# Altium PCB SiLPA_HE.PcbDoc (part 2 of 10)
Units mm, origin at the board's own origin, x right, y up, seen from the top; angles counter-clockwise.
Board outline 222.47 x 100.01 mm, 4 copper layers (Top Layer, Int1 (GND), Int2 (PWR), Bottom Layer), stack 1.508 mm thick; 661 components, 355 nets, 1925 pads, 1744 vias.
Unrouted connection lines stored in the file: 360.
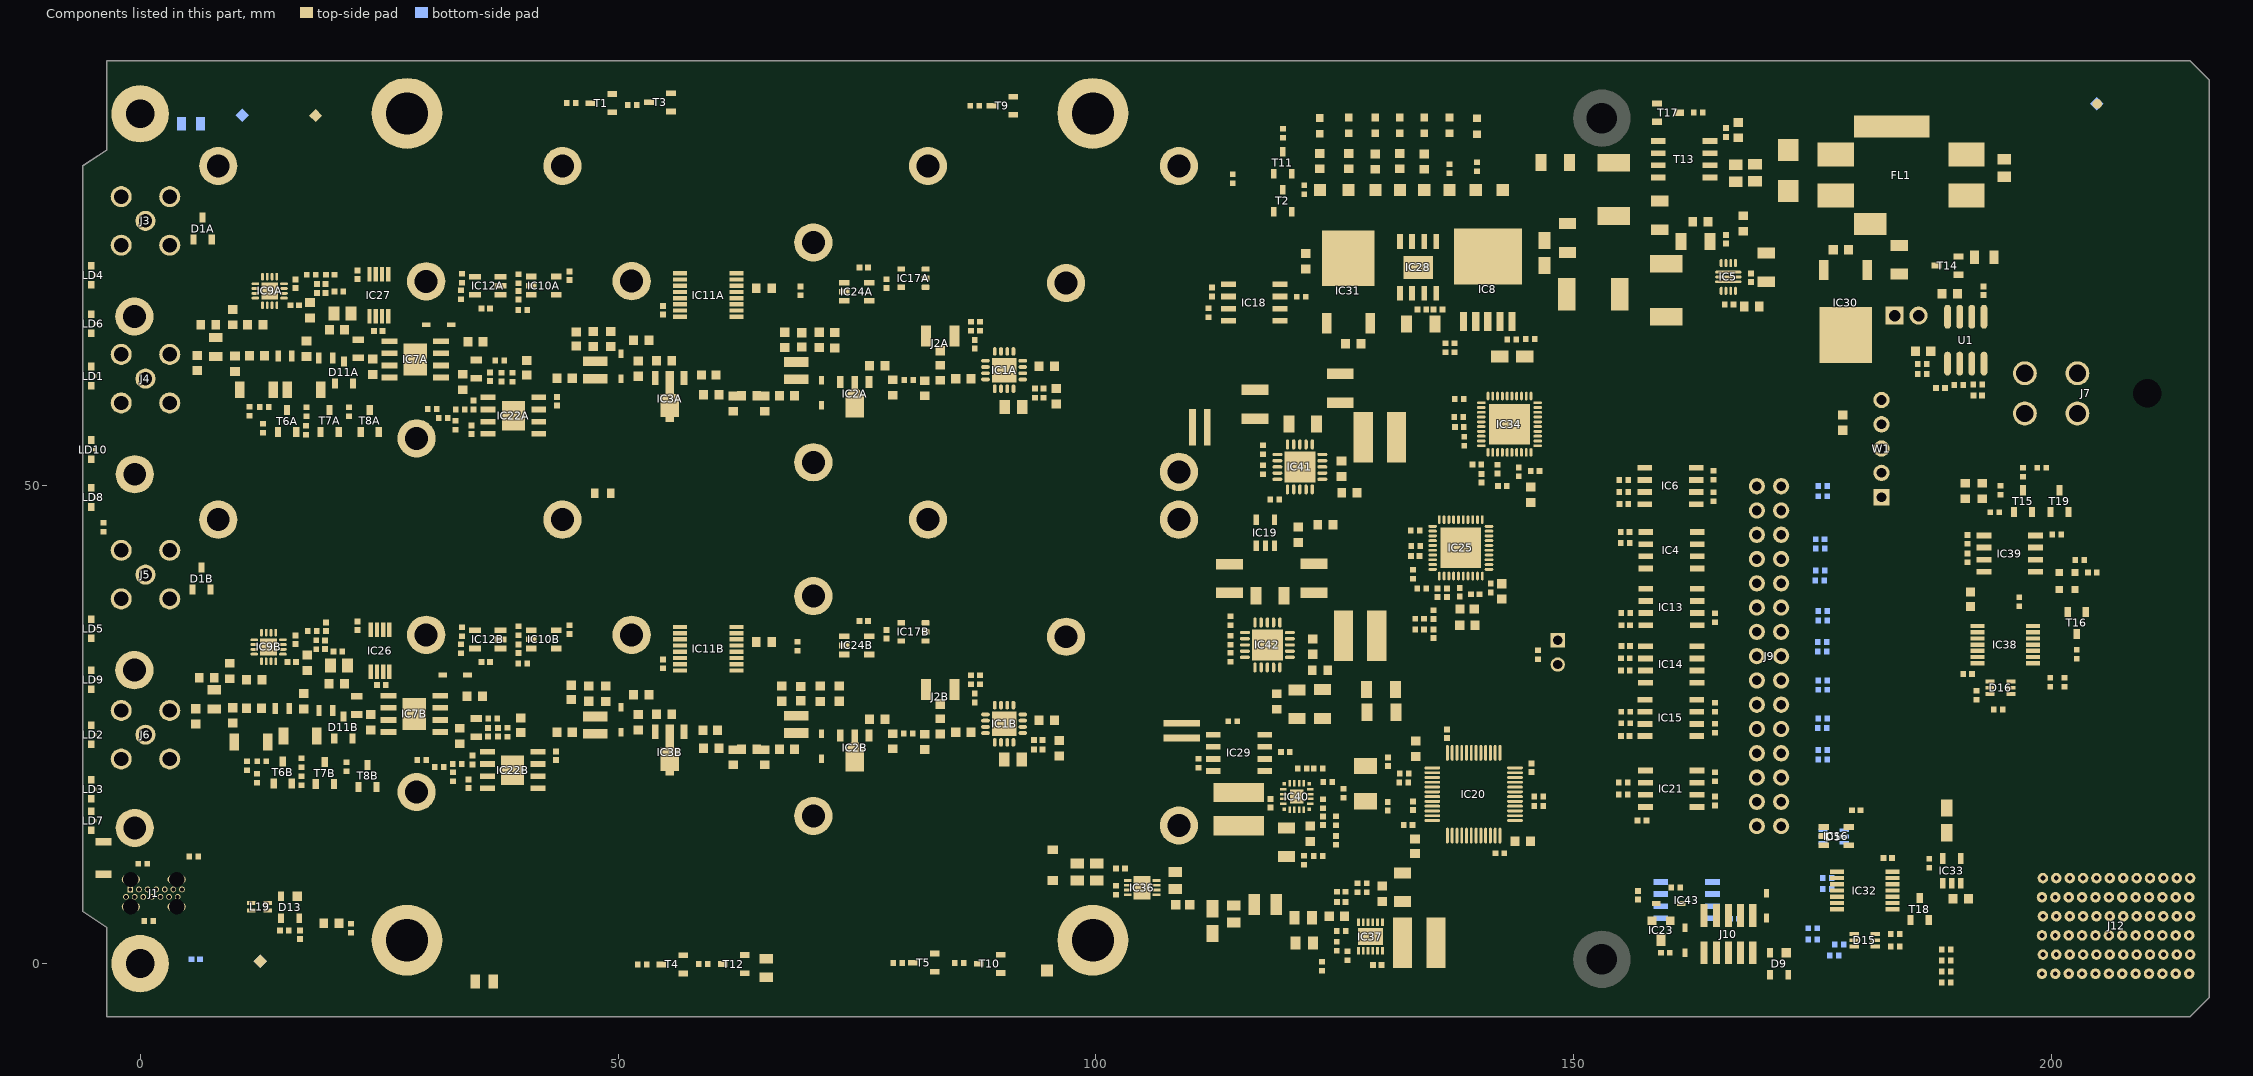
[diagram p4: the components of this part, seen from the top]

## Components (designator, comment, footprint, x,y, rotation, side; value= is the part's Value field where it differs from the comment) (continued)
J10 "Header 10" HARWIN_M50-3600542 166.167,3.082 r180 top
J11 "KK®" MOLEX_22-04-1021 184.802,67.793 r0 top
J12 "" AMPHENOL_10052825-101LF 206.716,3.943 r90 top locked
JP1 "1798942 (goldpin 2x 2.54)" jump 148.31,33.821 r0 top
L1A "1000R@100MHz" INDC1608X95N 72.677,65.213 r270 top (schematic designator L1)
L1B "1000R@100MHz" INDC1608X95N 73.127,28.243 r270 top (schematic designator L1)
L2A "1000R@100MHz" INDC1608X95N 52.417,65.213 r0 top (schematic designator L2)
L2B "1000R@100MHz" INDC1608X95N 52.427,28.143 r0 top (schematic designator L2)
L3A "1uH" IND_ABRACON_AISC-1008 68.647,62.023 r270 top (schematic designator L3)
L3B "1uH" IND_ABRACON_AISC-1008 68.647,25.023 r270 top (schematic designator L3)
L4A "1uH" IND_ABRACON_AISC-1008 47.627,62.098 r270 top (schematic designator L4)
L4B "1uH" IND_ABRACON_AISC-1008 47.627,24.943 r270 top (schematic designator L4)
L5A "390R@100MHz" INDC1608X95N 95.823,59.356 r90 top (schematic designator L5)
L5B "390R@100MHz" INDC1608X95N 96.176,22.52 r90 top (schematic designator L5)
L8 "1.5uH" IND_TDK_SPM6530 154.177,80.993 r270 top
L9 "1.5uH" IND_TDK_SPM6530 159.677,70.443 r90 top
L10 "1.5uH" IND_TDK_SPM6530 152.027,70.043 r180 top
L11 "4.7uH" IND_WURTH_WE-SPC-4838 129.707,55.06 r180 top
L12A "1.2uH" IND_TDK_ADL2012 22.815,64.323 r90 top (schematic designator L12)
L12B "1.2uH" IND_TDK_ADL2012 22.653,27.004 r90 top (schematic designator L12)
L13A "1.2uH" IND_TDK_ADL2012 35.177,62.193 r270 top (schematic designator L13)
L13B "1.2uH" IND_TDK_ADL2012 35.177,24.693 r270 top (schematic designator L13)
L15A "" IND_MURATA_LQW18AN_G8 19.427,63.343 r180 top value=4.7nH (schematic designator L15)
L15B "" IND_MURATA_LQW18AN_G8 19.429,26.483 r180 top value=4.7nH (schematic designator L15)
L16A "" IND_MURATA_LQW18AN_G8 15.161,63.57 r180 top value=6.8nH (schematic designator L16)
L16B "" IND_MURATA_LQW18AN_G8 14.874,26.71 r180 top value=6.8nH (schematic designator L16)
L17 "1uH" INDC2620X100N 117.689,6.161 r180 top
L18 "120R@100MHz" INDC1608X65N 109.076,6.147 r180 top
L19 "90R@100MHz" IND_MURATA_DLW21S 12.493,5.938 r0 top
L20 "10uH" IND_WURTH_WE-SPC-4838 133.803,2.178 r0 top
L21 "4.7uH" IND_WURTH_WE-SPC-4838 114.927,16.166 r90 top
L22 "4.7uH" IND_WURTH_WE-SPC-4838 127.627,34.279 r180 top
LD1 "" LED_AVAGO_HSMC-C120 -5.1,61.464 r90 top locked
LD2 "Green" LED_AVAGO_HSME-C120 -5.1,23.943 r90 top locked
LD3 "" LED_AVAGO_HSME-C120 -5.1,18.243 r90 top locked
LD4 "" LED_AVAGO_HSME-C120 -5.1,72.002 r90 top locked
LD5 "" LED_AVAGO_HSME-C120 -5.1,35.025 r90 top locked
LD6 "" LED_AVAGO_HSME-C120 -5.1,66.943 r90 top locked
LD7 "" LED_AVAGO_HSME-C120 -5.1,14.943 r90 top locked
LD8 "" LED_AVAGO_HSMC-C120 -5.1,48.768 r90 top locked
LD9 "" LED_AVAGO_HSME-C120 -5.1,29.693 r90 top locked
LD10 "" LED_AVAGO_HSMC-C120 -5.1,53.768 r90 top locked
LD11 "Green" LED_KINGBRIGHT_KPH-1608CGCKr 136.977,87.693 r270 top
LD12 "Green" LED_KINGBRIGHT_KPH-1608CGCKr 134.336,87.693 r270 top
LD13 "Green" LED_KINGBRIGHT_KPH-1608CGCKr 139.859,87.593 r270 top
LD14 "Green" LED_KINGBRIGHT_KPH-1608CGCKr 129.227,87.693 r270 top
LD15 "Green" LED_KINGBRIGHT_KPH-1608CGCKr 126.427,87.693 r270 top
LD16 "Green" LED_KINGBRIGHT_KPH-1608CGCKr 123.427,87.634 r270 top
LD18 "Green" LED_KINGBRIGHT_KPH-1608CGCKr 131.796,87.693 r270 top
M1 "Plated Hole" MTG300_600#1 -0.073,96.193 r0 top locked
M4 "Plated Hole" MTG300_600#2 0.163,0 r0 top locked
Q1 "8MHz" XTAL_TXC_7A 128.175,18.825 r270 top
R1A "100" RESC1005X40N 86.927,66.693 r270 top (schematic designator R1)
R1B "100" RESC1005X40N 86.927,29.693 r270 top (schematic designator R1)
R2A "100" RESC1005X40N 87.867,66.683 r270 top (schematic designator R2)
R2B "100" RESC1005X40N 87.867,29.683 r270 top (schematic designator R2)
R3A "1k" RESC1608X55N 54.827,63.083 r180 top (schematic designator R3)
R3B "1k" RESC1608X55N 54.827,26.083 r180 top (schematic designator R3)
R4A "Undefined" RESC1608X55N 83.687,61.813 r270 top (schematic designator R4)
R4B "Undefined" RESC1608X55N 83.687,24.813 r270 top (schematic designator R4)
R5A "37R4" RESC1608X55N 63.717,59.403 r180 top (schematic designator R5)
R5B "37R4" RESC1608X55N 63.717,22.403 r180 top (schematic designator R5)
R6 "0" RESC1005X40N 177.736,1.993 r180 bottom
R7A "0" RESC1608X55N 82.097,60.193 r90 top (schematic designator R7)
R7B "0" RESC1608X55N 82.097,23.193 r90 top (schematic designator R7)
R8A "0" RESC1608X55N 78.727,60.263 r90 top (schematic designator R8)
R8B "0" RESC1608X55N 78.727,23.263 r90 top (schematic designator R8)
R9A "150" RESC1608X55N 65.357,58.583 r90 top (schematic designator R9)
R9B "150" RESC1608X55N 65.357,21.583 r90 top (schematic designator R9)
R10A "150" RESC1608X55N 62.037,58.583 r90 top (schematic designator R10)
R10B "150" RESC1608X55N 62.037,21.583 r90 top (schematic designator R10)
R11 "330" RESC1005X40N 45.117,90.043 r0 top
R12 "330" RESC1005X40N 51.492,89.803 r0 top
R13 "330" RESC1005X40N 5.627,11.197 r0 top
R14 "330" RESC1005X40N 52.533,-0.089 r0 top
R15 "330" RESC1005X40N 58.906,-0.049 r0 top
R16 "100" RESC1005X40N 155.386,43.983 r0 top
R17 "49R9" RESC1608X55N 168.605,68.743 r0 top
R18A "0" RESC1005X40N 38.964,61.352 r270 top (schematic designator R18)
R18B "0" RESC1005X40N 38.427,24.193 r270 top (schematic designator R18)
R19A "39" RESC1005X40N 37.64,63.073 r180 top (schematic designator R19)
R19B "39" RESC1005X40N 36.913,25.622 r180 top (schematic designator R19)
R20 "10k" RESC1005X40N 121.788,80.943 r90 top
R21A "750" RESC1608X55N 33.768,60.833 r270 top (schematic designator R21)
R21B "750" RESC1608X55N 33.447,23.803 r270 top (schematic designator R21)
R22 "10k" RESC1005X40N 194.005,47.218 r180 top
R23A "1k" RESC1005X40N 39.587,71.665 r90 top (schematic designator R23)
R23B "1k" RESC1005X40N 39.587,34.818 r90 top (schematic designator R23)
R24A "0" RESC1005X40N 17.914,72.064 r0 top (schematic designator R24)
R24B "0" RESC1005X40N 18.004,34.793 r0 top (schematic designator R24)
R25A "0" RESC1608X55N 65.267,70.643 r0 top (schematic designator R25)
R25B "0" RESC1608X55N 65.267,33.643 r0 top (schematic designator R25)
R26 "100" RESC1005X40N 164.775,17.008 r90 top
R27A "82" RESC1608X55N 9.705,67.626 r270 top (schematic designator R27)
R27B "82" RESC1608X55N 9.375,30.6 r270 top (schematic designator R27)
R28 "56k" RESC1608X55N 163.227,77.599 r180 top
R29A "15k" RESC1005X40N 12.979,58.228 r180 top (schematic designator R29)
R29B "15k" RESC1005X40N 12.742,21.169 r180 top (schematic designator R29)
R30 "8k2" RESC1608X55N 167.727,77.422 r270 top
R31A "3R9" RESC1005X40N 18.5,70.625 r270 top (schematic designator R31)
R31B "3R9" RESC1005X40N 18.427,33.348 r270 top (schematic designator R31)
R32A "10k" RESC1005X40N 33.557,69.973 r90 top (schematic designator R32)
R32B "10k" RESC1005X40N 33.557,32.943 r90 top (schematic designator R32)
R33A "20k" RESC1005X40N 33.677,71.693 r270 top (schematic designator R33)
R33B "20k" RESC1005X40N 33.677,34.693 r270 top (schematic designator R33)
R34 "100" RESC1005X40N 164.62,48.858 r90 top
R35 "100" RESC1005X40N 155.211,49.328 r0 top
R36 "100" RESC1005X40N 164.62,51.068 r90 top
R37 "100" RESC1005X40N 155.211,50.598 r0 top
R38 "100" RESC1005X40N 164.777,36.2 r90 top
R39 "100" RESC1005X40N 155.405,36.67 r0 top
R40 "0" RESC1005X40N 177.254,0.857 r180 bottom
R41 "0" RESC1005X40N 188.957,0.306 r0 top
R42 "100" RESC1005X40N 155.394,31.944 r0 top
R43 "100" RESC1005X40N 155.394,30.674 r0 top
R44 "100" RESC1005X40N 164.74,24.602 r90 top
R45 "100" RESC1005X40N 155.427,25.139 r0 top
R46 "100" RESC1005X40N 164.74,26.812 r90 top
R47 "100" RESC1005X40N 155.427,26.342 r0 top
R48 "0" RESC1005X40N 188.957,1.451 r0 top
R49 "0" RESC1005X40N 188.957,-0.84 r0 top
R50 "0" RESC1005X40N 188.957,-1.985 r0 top
R51 "100k" RESC1608X55N 167.177,87.193 r270 top
R52A "82" RESC1005X40N 40.031,68.363 r180 top (schematic designator R52)
R52B "82" RESC1005X40N 40.039,31.395 r180 top (schematic designator R52)
R53 "22" RESC1005X40N 198.957,51.873 r0 top
R54 "200" RESC1005X40N 196.971,51.403 r90 top
R55 "330" RESC1005X40N -3.838,45.637 r90 top
R56 "100k" RESC1005X40N 186.452,62.718 r180 top
R57 "33k" RESC1005X40N 190.277,60.518 r180 top
R58 "22k" RESC1005X40N 186.457,61.693 r0 top
R59A "3k9" RESC1005X40N 17.406,57.725 r270 top (schematic designator R59)
R59B "3k9" RESC1005X40N 16.864,21.011 r270 top (schematic designator R59)
R60A "82" RESC1005X40N 21.837,57.725 r270 top (schematic designator R60)
R60B "82" RESC1005X40N 21.604,20.594 r270 top (schematic designator R60)
R61 "10k" RESC1005X40N 114.311,82.095 r270 top
R62A "10k" RESC1005X40N 12.855,56.021 r90 top (schematic designator R62)
R62B "10k" RESC1005X40N 12.25,19.4 r90 top (schematic designator R62)
R63 "10k" RESC1005X40N 146.227,32.31 r90 top
R64 "330" RESC1005X40N 119.567,86.887 r270 top
R65 "10k" RESC1005X40N 123.647,-0.281 r270 top
R66 "10k" RESC1005X40N 159.579,1.132 r0 top
R67 "10k" RESC1005X40N 192.116,28.062 r270 top
R68 "18k" RESC1005X40N 192.252,60.568 r180 top
R69 "24k" RESC1608X55N 20.011,4.222 r180 top
R70 "10k" RESC1005X40N 22.081,3.714 r270 top
R71A "10k" RESC1005X40N 17.35,55.8 r90 top (schematic designator R71)
R71B "10k" RESC1005X40N 16.864,19.111 r90 top (schematic designator R71)
R72 "10k" RESC1005X40N 163.03,89.018 r0 top
R73A "1k54" RESC2012X60N 7.925,64.5 r270 top (schematic designator R73)
R73B "1k54" RESC2012X60N 7.775,27.65 r270 top (schematic designator R73)
R74 "330" RESC1005X40N 87.306,89.743 r0 top
R75 "2k2" RESC1005X40N 146.302,16.468 r180 top
R76 "2k2" RESC1005X40N 146.302,17.493 r180 top
R77 "2k2" RESC1005X40N 132.262,19.886 r0 top
R78 "2k2" RESC1005X40N 132.215,18.948 r0 top
R79 "10k" RESC1005X40N 194.402,26.589 r0 top
R80 "24k" RESC1005X40N 143.497,65.308 r180 top
R81 "3k9" RESC1005X40N 145.421,65.324 r180 top
R82 "27k" RESC1005X40N 134.105,68.438 r180 top
R83 "3k" RESC1005X40N 135.781,68.438 r180 top
R84 "330" RESC1005X40N 85.699,0.069 r0 top
R85 "0" RESC1005X40N 134.072,39.243 r180 top
R86 "0" RESC1005X40N 133.177,40.743 r270 top
R87 "0" RESC1005X40N 133.453,43.676 r180 top
R88 "0" RESC1005X40N 133.397,45.303 r180 top
R89 "10K" RESC1005X40N 194.636,49.518 r270 top value=10k
R90 "10k" RESC1005X40N 196.591,37.868 r270 top
R91 "4R7" RESC2012X60N 192.927,73.893 r180 top
R92 "0" RESC1005X40N 176.027,22.337 r180 bottom
R93 "10k" RESC1005X40N 160.672,7.976 r0 top
R94 "5k1" RESC1005X40N 0.266,10.447 r180 top
R95 "5k1" RESC1005X40N 0.897,4.443 r180 top
R96 "0" RESC1005X40N 139.859,52.2 r180 top
R97 "0" RESC1005X40N 138.527,54.643 r270 top
R98 "0" RESC1005X40N 137.961,57.174 r180 top
R99 "0" RESC1005X40N 138.027,59.043 r180 top
R100 "330" RESC1005X40N 79.246,0.069 r0 top
R101A "0" RESC1005X40N 80.417,61.051 r180 top (schematic designator R101)
R101B "0" RESC1005X40N 80.379,24.051 r180 top (schematic designator R101)
R102 "0" RESC1005X40N 137.527,64.443 r270 top
R103 "0" RESC1005X40N 136.582,64.413 r90 top
R104 "0" RESC1005X40N 128.327,7.943 r270 top
R105 "0" RESC1005X40N 188.352,60.193 r0 top
R106 "3k3" RESC1608X55N 134.336,83.895 r90 top
R107 "10k" RESC1005X40N 139.859,83.381 r90 top
R108 "1k" RESC1608X55N 129.227,83.895 r90 top
R109 "1k" RESC1608X55N 126.427,83.943 r90 top
R110 "1k" RESC1608X55N 123.427,83.943 r90 top
R111 "10k" RESC1005X40N 201.332,29.45 r90 top
R112 "2k7" RESC1608X55N 192.711,49.449 r90 top
R113 "10k" RESC1005X40N 199.832,29.45 r90 top
R114 "0" RESC1005X40N 202.602,32.368 r90 top
R115 "2k7" RESC1608X55N 190.927,49.449 r270 top
R116 "10k" RESC1005X40N 187.177,10.493 r90 top
R117 "100" RESC1005X40N 155.177,17.693 r0 top
R118 "100" RESC1005X40N 164.775,19.533 r90 top
R119 "100" RESC1005X40N 155.177,18.943 r0 top
R120 "0" RESC1005X40N 174.968,3.694 r180 bottom
R121 "0" RESC1005X40N 176.497,7.813 r180 bottom
R122 "0" RESC1005X40N 174.968,2.503 r180 bottom
R123 "0" RESC1005X40N 176.497,8.943 r180 bottom
R124A "2k4" RESC1005X40N 31.723,57.092 r0 top (schematic designator R124)
R124B "2k4" RESC1005X40N 29.475,21.279 r0 top (schematic designator R124)
R125A "22k" RESC1005X40N 34.866,58.438 r270 top (schematic designator R125)
R125B "22k" RESC1005X40N 34.789,21.299 r270 top (schematic designator R125)
R126A "22k" RESC1005X40N 33.504,57.968 r180 top (schematic designator R126)
R126B "22k" RESC1005X40N 33.187,20.878 r180 top (schematic designator R126)
R127A "0" RESC1005X40N 32.99,56.3 r270 top (schematic designator R127)
R127B "0" RESC1005X40N 32.717,19.534 r270 top (schematic designator R127)
R128 "0" RESC1005X40N 127.361,7.943 r270 top
R129 "33k" RESC1005X40N 102.108,7.693 r270 top
R130 "Undefined" RESC1005X40N 125.661,3.39 r0 top
R131 "10k" RESC1005X40N 126.331,0.803 r270 top
R132 "10k" RESC1005X40N 102.564,9.945 r180 top
R133 "22" RESC1005X40N 183.639,1.793 r180 top
R134 "56k" RESC1005X40N 125.191,1.812 r270 top
R135 "240k" RESC1005X40N 121.564,20.415 r180 top
R136 "100k" RESC1005X40N 123.767,16.729 r270 top
R137 "0" RESC1608X55N 126.507,49.26 r0 top
R138 "22" RESC1005X40N 183.619,3.093 r180 top
R139 "100k" RESC1005X40N 125.116,14.932 r90 top
R140 "160k" RESC1005X40N 117.457,53.739 r90 top
R141A "2k" RESC1005X40N 11.427,57.778 r90 top (schematic designator R141)
R141B "2k" RESC1005X40N 11.163,20.712 r90 top (schematic designator R141)
R142 "10k" RESC1005X40N 117.457,51.682 r90 top
R143 "10k" RESC1005X40N 123.24,20.415 r180 top
R144 "10k" RESC1005X40N 118.707,48.56 r180 top
R145 "0" RESC1005X40N 176.027,49.941 r180 bottom
R146 "0" RESC1005X40N 175.777,43.443 r180 bottom
R147 "0" RESC1005X40N 175.777,41.143 r180 bottom
R148 "0" RESC1005X40N 176.027,35.893 r180 bottom
R149 "0" RESC1005X40N 175.997,33.643 r180 bottom
R150 "0" RESC1005X40N 176.027,28.643 r180 bottom
R151 "0" RESC1005X40N 176.027,25.643 r180 bottom
R152 "10k" RESC1005X40N 124.227,18.995 r180 top
R153 "0" RESC1608X55N 123.427,30.693 r0 top
R154 "160k" RESC1005X40N 114.087,35.848 r90 top
R155 "0" RESC3216X65N 121.624,56.446 r180 top
R156 "10k" RESC1005X40N 114.087,33.809 r90 top
R157 "10k" RESC1005X40N 114.087,32.035 r90 top
R158 "0" RESC3216X65N 118.202,38.47 r180 top
R159 "0" RESC1005X40N 123.261,11.244 r180 top
R160 "0" RESC1005X40N 121.75,10.788 r90 top
R161 "0" RESC1005X40N 125.917,17.839 r270 top
R164A "49R9" RESC1608X55N 7.125,66.825 r0 top (schematic designator R164)
R164B "49R9" RESC1608X55N 6.975,29.9 r0 top (schematic designator R164)
R165A "0" RESC1005X40N 30.553,58.011 r0 top (schematic designator R165)
R165B "0" RESC1005X40N 31.3,20.55 r0 top (schematic designator R165)
R166A "10k" RESC1005X40N 69.1,70.365 r90 top (schematic designator R166)
R166B "10k" RESC1005X40N 68.774,33.193 r90 top (schematic designator R166)
R168 "0" RESC1005X40N 176.027,29.621 r180 bottom
R171 "0" RESC1608X55N 123.995,45.893 r180 top
R172 "0" RESC1608X55N 118.927,27.413 r90 top
R173 "0R01" RES_BOURNS_CFG0612 110.881,56.118 r180 top
R174 "0" RESC1005X40N 111.783,68.085 r270 top
R175 "1M1" RESC2012X60N 5.327,87.843 r0 bottom
R176 "0" RESC1005X40N 121.488,69.763 r0 top
R177 "10M" RESC2113X55N 65.507,-0.458 r90 top
R178 "10M" RESC2113X55N 36.002,-1.857 r180 top
R179 "0R01" RES_BOURNS_CFG0612 108.96,24.371 r270 top
R180 "0" RESC1005X40N 114.293,25.35 r180 top
R181 "0" RESC1005X40N 110.705,20.939 r270 top
R182 "10k" RESC1005X40N 133.848,34.972 r180 top
R183 "10k" RESC1005X40N 133.848,36.072 r180 top
R197 "0" RESC1005X40N 200.491,44.868 r0 top
R216 "3k3" RESC1608X55N 131.796,83.943 r90 top
R218 "10k" RESC1005X40N 136.977,83.143 r90 top
R235 "0" RESC1005X40N 176.027,48.893 r180 bottom
R236 "0" RESC1005X40N 175.747,44.393 r180 bottom
R241 "0" RESC1005X40N 175.727,40.093 r180 bottom
R242 "0" RESC1005X40N 176.027,36.893 r180 bottom
R243 "0" RESC1005X40N 175.997,32.643 r180 bottom
R247 "0" RESC1005X40N 175.997,24.643 r180 bottom
R248 "0" RESC1005X40N 176.027,21.365 r180 bottom
R274 "10K" RESC1005X40N 202.924,42.199 r180 top value=10k
RT1 "100k" THERMC1608X95N 48.402,49.193 r180 top
S1 "9774140360" 9774140360 27.927,88.943 r0 top
S2 "9774140360" 9774140360 99.677,88.943 r0 top
S3 "9774140360" 9774140360 27.927,2.443 r0 top
S4 "9774140360" 9774140360 99.677,2.443 r0 top
SCREW1A "" BOSSARD_BN5687-3061579_v 70.427,75.443 r90 top value=M2x4 (schematic designator SCREW1)
SCREW1B "" BOSSARD_BN5687-3061579_v 70.427,38.443 r90 top value=M2x4 (schematic designator SCREW1)
SCREW2A "" BOSSARD_BN5687-3061579_v 82.427,83.443 r90 top value=M2x4 (schematic designator SCREW2)
SCREW2B "" BOSSARD_BN5687-3061579_v 82.427,46.443 r90 top value=M2x4 (schematic designator SCREW2)
SCREW3A "" BOSSARD_BN5687-3061579_v 44.177,83.443 r90 top value=M2x4 (schematic designator SCREW3)
SCREW3B "" BOSSARD_BN5687-3061579_v 44.177,46.443 r90 top value=M2x4 (schematic designator SCREW3)
SCREW4A "" BOSSARD_BN5687-3061579_v 8.177,83.443 r90 top value=M2x4 (schematic designator SCREW4)
SCREW4B "" BOSSARD_BN5687-3061579_v 8.177,46.443 r90 top value=M2x4 (schematic designator SCREW4)
SCREW5A "" BOSSARD_BN5687-3061579_v -0.603,67.693 r90 top locked value=M2x4 (schematic designator SCREW5)
SCREW5B "" BOSSARD_BN5687-3061579_v -0.603,30.693 r90 top locked value=M2x4 (schematic designator SCREW5)
SCREW6A "" BOSSARD_BN5687-3061579_v 51.427,71.393 r90 top value=M2x4 (schematic designator SCREW6)
SCREW6B "" BOSSARD_BN5687-3061579_v 51.427,34.393 r90 top value=M2x4 (schematic designator SCREW6)
SCREW7A "" BOSSARD_BN5687-3061579_v 28.927,54.943 r90 top value=M2x4 (schematic designator SCREW7)
SCREW7B "" BOSSARD_BN5687-3061579_v 28.927,17.943 r90 top value=M2x4 (schematic designator SCREW7)
SCREW8A "" BOSSARD_BN5687-3061579_v -0.563,51.193 r90 top locked value=M2x4 (schematic designator SCREW8)
SCREW8B "" BOSSARD_BN5687-3061579_v -0.563,14.193 r90 top locked value=M2x4 (schematic designator SCREW8)
SCREW9A "" BOSSARD_BN5687-3061579_v 29.927,71.376 r90 top locked value=M2x4 (schematic designator SCREW9)
SCREW9B "" BOSSARD_BN5687-3061579_v 29.927,34.443 r90 top value=M2x4 (schematic designator SCREW9)
SCREW10A "" BOSSARD_BN5687-3061579_v 108.677,51.443 r90 top value=M2x4 (schematic designator SCREW10)
SCREW10B "" BOSSARD_BN5687-3061579_v 108.677,14.443 r90 top value=M2x4 (schematic designator SCREW10)
SCREW11A "" BOSSARD_BN5687-3061579_v 108.677,83.443 r90 top value=M2x4 (schematic designator SCREW11)
SCREW11B "" BOSSARD_BN5687-3061579_v 108.677,46.443 r90 top value=M2x4 (schematic designator SCREW11)
SCREW12A "" BOSSARD_BN5687-3061579_v 70.427,52.443 r90 top value=M2x4 (schematic designator SCREW12)
SCREW12B "" BOSSARD_BN5687-3061579_v 70.427,15.443 r90 top value=M2x4 (schematic designator SCREW12)
SCREW13A "" BOSSARD_BN5687-3061579_v 96.877,71.193 r90 top value=M2x4 (schematic designator SCREW13)
SCREW13B "" BOSSARD_BN5687-3061579_v 96.877,34.193 r90 top value=M2x4 (schematic designator SCREW13)
SW1 "" FP-B3U-3000PM-MFG -4.173,11.063 r90 top locked
T1 "BSH103" SOT95P230X110-3N 48.262,90.013 r180 top
T2 "BSH103" SOT95P230X110-3N 119.543,79.793 r90 top
T3 "BSH103" SOT95P230X110-3N 54.391,90.102 r180 top
T4 "BSH103" SOT95P230X110-3N 55.663,-0.089 r180 top
T5 "BSH103" SOT95P230X110-3N 81.977,0.093 r180 top
T6A "BSS138LT1G" SOT95P240X110-3N 15.377,56.753 r90 top (schematic designator T6)
T6B "BSS138LT1G" SOT95P240X110-3N 14.925,20 r90 top (schematic designator T6)
T7A "BSS138LT1G" SOT95P240X110-3N 19.825,56.775 r90 top (schematic designator T7)
T7B "BSS138LT1G" SOT95P240X110-3N 19.325,19.925 r90 top (schematic designator T7)
T8A "BSS138LT1G" SOT95P240X110-3N 24.022,56.775 r90 top (schematic designator T8)
T8B "BSS138LT1G" SOT95P240X110-3N 23.789,19.644 r90 top (schematic designator T8)
T9 "BSH103" SOT95P230X110-3N 90.218,89.743 r180 top
T10 "BSH103" SOT95P230X110-3N 88.869,-0.031 r180 top
T11 "BSH103" SOT95P230X110-3N 119.543,83.779 r90 top
T12 "BSH103" SOT95P230X110-3N 62.115,-0.049 r180 top
T13 "SI4425DDY-T1-GE3" SOIC127P600X175-8N 161.527,84.143 r180 top
T14 "BSS138LT1G" SOT95P240X110-3N 189.102,73.018 r180 top
T15 "BSS138LT1G" SOT95P240X110-3N 196.986,48.368 r90 top
T16 "BSS138LT1G" SOT95P240X110-3N 202.602,35.641 r270 top
T17 "BSS138LT1G" SOT95P240X110-3N 159.852,89.018 r0 top
T18 "BSS138LT1G" SOT95P240X110-3N 186.177,5.693 r90 top
T19 "BSS138LT1G" SOT95P240X110-3N 200.802,48.368 r90 top
TP1 "Test Point" TPS127 134.336,80.943 r0 top
TP2 "Test Point" TPS127 139.731,80.943 r0 top
TP3 "Test Point" TPS127 129.227,80.943 r0 top
TP4 "Test Point" TPS127 126.414,80.943 r0 top
TP5 "Test Point" TPS127 123.427,80.943 r0 top
TP16 "Test Point" TPS127 131.796,80.943 r270 top
TP18 "Test Point" TPS127 136.977,80.943 r270 top
TP22 "Test Point" TPS127 142.557,80.943 r90 top
TP23 "Test Point" TPS127 94.877,-0.717 r90 top
U1 "TC649EOA" SOIC-OA8_M 190.992,65.218 r90 top
W1 "Header 5" SAMTEC_HTSW-105-23-L-S 182.177,48.798 r90 top
WASHER2 "D11.1xd6.6" Keystone_7687 -15.5,77.85 r0 top
WASHER4 "D11.1xd6.6" Keystone_7687 -15.5,61.546 r0 top
WASHER6 "D11.1xd6.6" Keystone_7687 -14.825,40.725 r0 top
WASHER8 "D11.1xd6.6" Keystone_7687 -14.825,23.975 r0 top

## Footprints (in the part's own frame and the unit in brackets; to place one, negate y for a bottom-side part, rotate by r counter-clockwise, add the part's x,y. Pads: shape width x height; smd on the part's side, far side on the other; paste and mask are expansions set on the pad)
3M_N2530-6002RB [mm] "30 Contacts - Straight .100\" x .100\" Low Profile Four-Wall Header"
  round 1.7 hole 1: 1(-17.78,-1.27) 2(-17.78,1.27) 3(-15.24,-1.27) 4(-15.24,1.27) 5(-12.7,-1.27) 6(-12.7,1.27) 7(-10.16,-1.27) 8(-10.16,1.27) 9(-7.62,-1.27) 10(-7.62,1.27) 11(-5.08,-1.27) 12(-5.08,1.27) 13(-2.54,-1.27) 14(-2.54,1.27) 15(0,-1.27) 16(0,1.27) 17(2.54,-1.27) 18(2.54,1.27) 19(5.08,-1.27) 20(5.08,1.27) 21(7.62,-1.27) 22(7.62,1.27) 23(10.16,-1.27) 24(10.16,1.27) 25(12.7,-1.27) 26(12.7,1.27) 27(15.24,-1.27) 28(15.24,1.27) 29(17.78,-1.27) 30(17.78,1.27)
  silkscreen extent -22.71,-4.85 22.71,4.52, body extent -22.71,-4.11 22.71,4.52, height 9.91
9774140360 [mm] "SMD Steel Spacer with internal Thread"
  round 7.4 smd paste-576.133: 1(0,0)
  round 0 hole 4.4 unplated: ""(0,0)
  body extent -3.03,-2.94 2.95,3.04, height 14
AMPHENOL_10052825-101LF [mm]
  round 1.1 hole 0.5: A1(-5,-7.65) A2(-3,-7.75) A3(-1,-7.65) A4(1,-7.75) A5(3,-7.65) A6(5,-7.75) B1(-5,-6.25) B2(-3,-6.35) B3(-1,-6.25) B4(1,-6.35) B5(3,-6.25) B6(5,-6.35) C1(-5,-4.85) C2(-3,-4.95) C3(-1,-4.85) C4(1,-4.95) C5(3,-4.85) C6(5,-4.95) D1(-5,-3.45) D2(-3,-3.55) D3(-1,-3.45) D4(1,-3.55) D5(3,-3.45) D6(5,-3.55) E1(-5,-2.05) E2(-3,-2.15) E3(-1,-2.05) E4(1,-2.15) E5(3,-2.05) E6(5,-2.15) F1(-5,-0.65) F2(-3,-0.75) F3(-1,-0.65) F4(1,-0.75) F5(3,-0.65) F6(5,-0.75) G1(-5,0.75) G2(-3,0.65) G3(-1,0.75) G4(1,0.65) G5(3,0.75) G6(5,0.65) H1(-5,2.15) H2(-3,2.05) H3(-1,2.15) H4(1,2.05) H5(3,2.15) H6(5,2.05) I1(-5,3.55) I2(-3,3.45) I3(-1,3.55) I4(1,3.45) I5(3,3.55) I6(5,3.45) J1(-5,4.95) J2(-3,4.85) J3(-1,4.95) J4(1,4.85) J5(3,4.95) J6(5,4.85) K1(-5,6.35) K2(-3,6.25) K3(-1,6.35) K4(1,6.25) K5(3,6.35) K6(5,6.25) L1(-5,7.75) L2(-3,7.65) L3(-1,7.75) L4(1,7.65) L5(3,7.75) L6(5,7.65)
  silkscreen extent -6.95,-4.65 6.95,11.85, body extent -6.95,-21.95 6.95,11.85, height 15.25
"ANALOG-DEVICES_LQFN(16) # 05-08-1798" [mm] "LQFN, 16-Lead, 0.50mm Pitch; 3.50mm W X 3.50mm L X 0.83mm H body (with 4 Tab 0.375 X0.375mm and with a Thermal Tab 1.43 X1.43mm)# 05-08-1798"
  rect 0.7x0.25 smd: 1(-1.4,0.75) 2(-1.4,0.25) 3(-1.4,-0.25) 4(-1.4,-0.75) 9(1.4,-0.75) 10(1.4,-0.25) 11(1.4,0.25) 12(1.4,0.75)
  rect 0.25x0.7 smd: 5(-0.75,-1.4) 6(-0.25,-1.4) 7(0.25,-1.4) 8(0.75,-1.4) 13(0.75,1.4) 14(0.25,1.4) 15(-0.25,1.4) 16(-0.75,1.4)
  rect 1.43x1.43 smd: 17(0,0)
  rect 0.375x0.375 smd: 18(-1.312,-1.312) 19(1.312,-1.312) 20(1.312,1.312) 21(-1.312,1.312)
  silkscreen extent -2.4,0.78 -2.2,0.97, body extent -1.5,-1.5 1.5,1.5, height 1.05
ANALOG-DEVICES_SOT-89(RK-3) [mm] "SOT89, 1.50mm Pitch; 3-Leads, 2.5mm W X 4.5mm L X 1.6mm H body"
  rect 1.25x0.7 smd: 1(-1.89,1.5) 3(-1.89,-1.5)
  rect 1.35x0.7 smd: 2(-1.84,0)
  rect 0.131x0.131 smd: 2(-0.968,-0.491) 2(-0.968,0.49) 2(-0.706,0.753) 2(-0.706,-0.753)
  rect 0.262x0.262 smd: 2(-0.771,0.556) 2(-0.771,-0.556)
  rect 3x0.85 smd: 2(0.335,0)
  rect 2.475x0.525 smd: 2(0.597,0.687) 2(0.597,-0.688)
  Top Layer region: -1.165,0.425 -0.64,0.95 -0.64,-0.95 -1.165,-0.425
  silkscreen extent -2.22,-2.25 1.24,2.58, body extent -2.44,-2.25 1.81,2.25, height 1.6
BOSSARD_BN5687-3061579_v [mm] "M2 L=4mm Hexalobular Socket Pan Head Screw, Fully Threaded - Stainless Steel A2"
  body extent -2,-2 2,2, height 1.6
CAPC1005X55N [mm] "Capacitor, Non-Polarized, Chip; 1.00mm L X 0.50mm W X 0.70mm H, IPC Medium Density"
  rect 0.62x0.62 smd: 1(-0.45,0) 2(0.45,0)
  body extent -0.52,-0.27 0.53,0.28, height 0.55
CAPC1608X87N [mm] "Chip Capacitor, Body 1.6x0.8mm IPC Medium Density"
  rect 0.95x1 smd: 1(-0.8,0) 2(0.8,0)
  body extent -0.87,-0.47 0.88,0.48, height 0.87
CAPC1608X90N [mm] "Chip Capacitor, Body 1.6x0.8mm IPC Medium Density"
  rect 0.95x0.95 smd: 1(-0.75,0) 2(0.75,0)
  body extent -0.85,-0.45 0.85,0.45, height 0.9
CAPC1709X95N [mm] "Capacitor, non-Polarized, Chip; 1.65mm L X 0.85mm W X 0.95mm H,IPC Medium Density"
  rect 0.95x1 smd: 1(-0.75,0) 2(0.75,0)
  body extent -0.87,-0.47 0.88,0.48, height 0.95
CAPC2012X95N [mm] "Chip Capacitor, Body 2.0x1.25mm, IPC Medium Density"
  rect 1.1x1.45 smd: 1(-0.9,0) 2(0.9,0)
  silkscreen extent 0,-0.58 0,0.58, body extent -1.05,-0.67 1.05,0.68, height 0.95
CAPC2012X110N [mm] "Chip Capacitor, Body 2.0x1.25mm, IPC Medium Density"
  rect 1.15x1.45 smd: 1(-0.9,0) 2(0.9,0)
  silkscreen extent 0,-0.58 0,0.58, body extent -1.05,-0.67 1.05,0.68, height 1.1
CAPC2012X135N [mm] "Chip Capacitor, Body 2.0x1.25mm, IPC Medium Density"
  rect 1.05x1.4 smd: 1(-0.9,0) 2(0.9,0)
  silkscreen extent 0,-0.58 0,0.58, body extent -1.05,-0.67 1.05,0.68, height 1.25
CAPC3216X180N [mm] "Chip Capacitor, Body 3.2x1.6mm, IPC Medium Density"
  rect 1.15x1.8 smd: 1(-1.5,0) 2(1.5,0)
  silkscreen extent -0.55,-0.8 0.55,0.8, body extent -1.7,-0.9 1.7,0.9, height 1.8
CAPC3225X280N [mm] "Chip Capacitor, Body 3.2x2.5mm, IPC Medium Density"
  rect 1.1x2.8 smd: 1(-1.5,0) 2(1.5,0)
  silkscreen extent -0.6,-1.25 0.6,1.25, body extent -1.7,-1.35 1.7,1.35, height 2.8
CAPMP3216X180N [mm] "Capacitor, Polarized, Molded  Body 3.2x1.6mm, IPC Medium Density"
  rect 1.8x1.25 smd: 1(-1.3,0) 2(1.3,0)
  silkscreen extent -2.4,-0.7 0,1.25, body extent -1.7,-0.9 1.7,0.9, height 1.6
CDBU [mil]
  rect 30x28 smd paste+0 mask+0: 1(-32.5,0) 2(32.5,0)
  silkscreen extent -10,-24 10,24, body extent -36,-19 36,19, height 33
DBV0005A_L [mm] "SOT23, 5-Leads, Body 3.05x1.75mm, Pitch 0.95mm, IPC High Density"
  rrect18% 0.8x0.55 smd: 1(-1.275,0.95) 2(-1.275,0) 3(-1.275,-0.95) 4(1.275,-0.95) 5(1.275,0.95)
  silkscreen extent -1.4,-1.55 0.5,1.9, body extent -1.42,-1.46 1.42,1.46, height 1.08
DELOCK_65848 [mm]
  round 2.1 hole 1.4: 1(0,0)
  round 2.2 hole 1.5: 2(-2.54,2.54) 2(-2.54,-2.54) 2(2.54,2.54) 2(2.54,-2.54)
  body extent -3.04,-3.17 18.96,3.09, height 9.15
DIOM5336X265N [mm] "DO-214-AA/SMB Diode, Molded Body; 5.34mm L X 3.625mm W X 2.65mm H, IPC Medium Density"
  rect 2.3x2.15 smd: 1(-2.15,0) 2(2.15,0)
  silkscreen extent -3.92,-1.8 2.65,1.8, body extent -2.7,-1.95 2.7,1.95, height 2.4
DIOMELF3515N [mm] "SOD80C, MELF Diode, 2-Leads, Body 3.5x1.5mm, IPC Medium Density"
  rect 1x1.75 smd: 1(-1.75,0) 2(1.75,0)
  silkscreen extent -0.85,-0.8 0.85,0.8, body extent -1.85,-0.8 1.85,0.8, height 1.6
FIDUCIAL_TOP_C100-200 [mm] "Round Fiducial Target, Top Layer, 1.0mm, Top Solder 2.0mm, Keepout =2.0mm"
  round 1 smd paste-0.51 mask+0.5: FTG2(0,0)
  Top Layer keep-out circle w0.1: c0,0 r1
FIDUCIAL_TOP_S100-200 [mm] "Square Fiducial Target, Top Layer, 1.0mm, Top Solder 2.0mm, Keepout =2.0mm"
  rect 1x1 smd rot 45 paste-0.51 mask+0.5: 1(0,0)
  Top Layer keep-out region: 1.414,0 0,-1.414 -1.414,0 0,1.414
FIL_MURATA_BNX02 [mm] "Block Type EMIFIL LC Combined Type, BNX02* Series"
  rect 3.8x2.5 smd: 1(-6.85,2.1) 2(6.85,2.1) 3(-6.85,-2.2) 4(6.85,-2.2)
  rect 7.9x2.3 smd: 4(1,-5.1)
  rect 3.4x2.3 smd: 4(3.25,5.1)
  silkscreen extent -5.95,-4.45 7.77,5.05, body extent -6.05,-4.55 6.05,4.55, height 3.1
FP-2169890001-MFG [mm]
  rrect100% 0.9x1.9 hole 1.6 slot 0.6 at 0 deg paste-2539.97 mask+0: 1(-1.43,5.575) 2(1.43,5.575) 3(-1.43,0.775) 4(1.43,0.775)
  rect 0.6x0.6 hole 0.4 paste-2539.97 mask+0: A1(-0.39,0.725)
  round 0.6 hole 0.4 paste-2539.97 mask+0: A4(-0.39,1.625) A5(-0.39,2.525) A6(-0.39,3.425) A7(-0.39,4.325) A9(-0.39,5.225) A12(-0.39,6.125) B1(0.39,5.675) B4(0.39,4.775) B5(0.39,3.875) B6(0.39,2.975) B7(0.39,2.075) B9(0.39,1.175) B12(0.39,0.275)
  silkscreen extent -2.65,0.5 1.98,7.42, body extent -2.08,-7.52 2.08,7.52, height 0.25
FP-B3U-3000PM-MFG [mm]
  rect 0.8x1.7 smd paste+0 mask+0: 1(-1.7,-0.35) 2(1.7,-0.35)
  silkscreen extent -1.6,-1.7 1.6,-1.58, body extent -2.2,-1.8 2.2,1.8, height 0.25
HARWIN_M50-3600542 [mm] "10 Contacts - Pitch 1.27mm - Dual Row SMT Vertical Pin Header"
  rect 0.74x2.4 smd: 1(-2.54,-1.95) 2(-2.54,1.95) 3(-1.27,-1.95) 4(-1.27,1.95) 5(0,-1.95) 6(0,1.95) 7(1.27,-1.95) 8(1.27,1.95) 9(2.54,-1.95) 10(2.54,1.95)
  silkscreen extent -3.17,-3.9 3.18,0.4, body extent -3.17,-2.81 3.17,2.69, height 4.69
HIROSE_U.FL-R-SMT-1(10) [mm] "Up to 6GHz Ultra Small Surface Mount Male Coaxial Connectors U.FL Series"
  rect 1x1.05 smd: 1(0,-1.525)
  rect 1.05x2.2 smd: 2(-1.475,0) 2(1.475,0)
  Top Layer keep-out lines w0.1: -0.6,-0.65 0.6,-0.65 0.6,0 ccw(c0,0) -0.6,0 -0.6,-0.65
  silkscreen extent -0.7,-0.69 0.7,1.55, body extent -1.5,-1.55 1.5,1.55, height 1.25
IND_ABRACON_AISC-1008 [mm] "Inductor, Molded Body; 2.92mm L X 2.79mm W, AISC-1008 Series"
  rect 1.02x2.54 smd: 1(-0.905,0) 2(0.905,0)
  silkscreen extent 0,-1.4 0,1.4, body extent -1.46,-1.39 1.46,1.4, height 2.29
IND_MURATA_DLW21S [mm] "Common Mode Choke Coil, DLW21S Series - Body 2 x 1.2mm"
  rect 0.9x0.4 smd: 1(-0.85,-0.4) 2(0.85,-0.4) 3(0.85,0.4) 4(-0.85,0.4)
  silkscreen extent -1.92,-0.6 0,0.6, body extent -1,-0.6 1,0.6, height 1.4
IND_MURATA_LQW18AN_G8 [mm] "SMT inductor 0603, Body Width 0.99mm Body Lenght 1.65mm Height 1mm"
  rect 0.57x1.15 smd: 1(-0.715,0) 2(0.715,0)
  silkscreen extent 0,-0.5 0,0.5, body extent -0.82,-0.49 0.83,0.5, height 1
IND_TDK_ADL2012 [mm] "Chip Inductor, EIA 0805, Metric 2012, Body 2.0x1.25mm"
  rect 0.7x1.2 smd: 1(-0.95,0) 2(0.95,0)
  silkscreen extent -0.3,-0.72 0.3,0.72, body extent -1.1,-0.72 1.1,0.73, height 1.4
IND_TDK_SPM6530 [mm] "SMD Inductor, 7.1mm L X 6.5mm W X 3mm H, TDK SPM6530 Series"
  rect 1.85x3.4 smd: 1(-2.775,0) 2(2.775,0)
  silkscreen extent -3.5,-3.2 3.5,3.2, body extent -3.6,-3.2 3.6,3.2, height 3.1
IND_WURTH_WE-SPC-4838 [mm] "SMD Inductor, Body 4.8x4.8mm"
  rect 2x5.3 smd: 1(-1.75,0) 2(1.75,0)
  silkscreen extent -0.4,-2.41 0.4,2.41, body extent -2.41,-2.41 2.41,2.41, height 3.81
INDC1005X55N [mm] "Chip Inductor, 2-Leads, EIA 0402, Metric 1005, Body 1x0.5mm, 0402IPC Medium Density"
  rect 0.6x0.62 smd: 1(-0.46,0) 2(0.46,0)
  body extent -0.52,-0.27 0.53,0.28, height 0.55
INDC1608X65N [mm] "Chip Inductor, 2-Leads, EIA 0603, Metric 1608, Body 1.6x0.8mm, IPC Medium Density"
  rect 1x1 smd: 1(-0.75,0) 2(0.75,0)
  body extent -0.87,-0.47 0.88,0.48, height 0.65
INDC1608X95N [mm] "Chip Inductor, 2-Leads, EIA 0603, Metric 1608, Body 1.6x0.8mm, IPC Medium Density"
  rect 0.95x1 smd: 1(-0.8,0) 2(0.8,0)
  body extent -0.87,-0.47 0.88,0.48, height 0.95
INDC2620X100N [mm] "Chip Inductor, EIA 1008, Metric 2520, Body 2.60mm L X 2.00mm W X 1.00mm H, IPC Medium Density"
  rect 1.2x2.2 smd: 1(-1.15,0) 2(1.15,0)
  silkscreen extent 0,-0.9 0,0.9, body extent -1.3,-1 1.3,1, height 1
jump [mm]
  rect 1.5x1.5 hole 0.965: 1(0,0)
  round 1.5 hole 0.965: 2(0,-2.54)
  silkscreen extent -1.2,-3.81 1.2,1.27, body extent -1.26,-3.84 1.19,1.24, height 8
Keystone_7687 [mm] "Polyphenylene Sulfide PPS Shoulder Washer"
LED_AVAGO_HSMC-C120 [mm] "Red Chip LED, 2-Leads, Body 1.7x1.1mm, Side Emitting Package"
  rect 0.8x0.7 smd: 1(-1,0) 2(1,0)
  rect 0.4x0.4 smd: 3(0,-0.35)
  silkscreen extent -1.12,-0.92 -0.88,-0.68, body extent -0.85,-0.3 0.85,0.8, height 0.7
LED_AVAGO_HSME-C120 [mm] "Green Chip LED, 2-Leads, Body 1.7x1.1mm, Side Emitting Package"
  rect 0.8x0.7 smd: 1(-1,0) 2(1,0)
  rect 0.4x0.4 smd: 3(0,-0.35)
  silkscreen extent -1.12,-0.92 -0.88,-0.68, body extent -0.85,-0.3 0.85,0.8, height 0.7
LED_KINGBRIGHT_KPH-1608CGCKr [mm] "SMT Green LED, Case 0603, Body L 1.6 x W 0.8mm H 0.65mm"
  rect 0.8x0.8 smd: 1(-0.825,0) 2(0.825,0)
  silkscreen extent -1.82,-0.4 0.08,0.4, body extent -0.8,-0.4 0.8,0.4, height 0.65
MINI-CIRCUITS_DF782 [mm] "MINI-CIRCUITS DF782 Case, 1.50mm pitch; 4 pin, 2.44mm W X 4.49mm L"
  rect 0.71x1.5 smd: 1(-1.5,-1.915) 3(1.5,-1.915)
  rect 0.917x2.41 smd: 2(0,-1.46)
  rect 0.92x0.493 smd: 4(0,2.418)
  rect 1.905x2.427 smd: 4(0,0.958)
  Top Layer region: -0.457,-0.751 -0.953,-0.255 -0.953,2.172 -0.46,2.665 0.46,2.665 0.953,2.172 0.953,-0.255 0.457,-0.751 0.457,-2.665 -0.457,-2.665
  silkscreen extent -2.3,-1.3 2.3,1.3, body extent -2.3,-2.12 2.3,2.12, height 1.6
MOLEX_22-04-1021 [mm] "2.5mm (.100\") Pitch KK® Header, Single Row, Vertical, 2 Circuits"
  rect 1.9x1.9 hole 1.2: 1(-1.25,0)
  round 1.9 hole 1.2: 2(1.25,0)
  silkscreen extent -2.25,-2.6 2.25,3.2, body extent -2.25,-2.6 2.25,3.2, height 11.7
MOLEX_39-30-0040 [mm] "4.20mm (.165\") Pitch Mini-Fit Jr. Header, Dual Row, Right Angle with Snap-in Plastic Peg PCB Lock, 4 Circuits"
  round 2.5 hole 1.8: 1(-2.1,2.75) 2(2.1,2.75) 3(-2.1,-2.75) 4(2.1,-2.75)
  round 1 hole 3 unplated mask+1: 5(0,10.05)
  silkscreen extent -2.64,-1.24 2.64,1.24, body extent -5.2,-3.28 4.8,16.65, height 11.4
MTG240_400#1 [mm] "Plated Through Hole: Hole Dia.=2.4mm Pad Dia.=4.0mm"
  round 4 hole 2.4: 1(0,0)
MTG240_400#2 [mm] "Plated Through Hole: Hole Dia.=2.4mm Pad Dia.=4.0mm"
  round 4 / inner round 3.5 / far side round 4 hole 2.4: 1(0,0)
MTG240_400#3 [mm] "Plated Through Hole: Hole Dia.=2.4mm Pad Dia.=4.0mm"
  round 4 hole 2.4: 1(0,-0.003)
MTG300_600#1 [mm] "Plated Through Hole: Hole Dia.=3.0mm Pad Dia.=6.0mm"
  round 6 hole 3: 1(0.073,-7.293)
MTG300_600#2 [mm] "Plated Through Hole: Hole Dia.=3.0mm Pad Dia.=6.0mm"
  round 6 hole 3: 1(-0.163,0)
QFN50P300X300X80-17N-S175 [mm] "QFN, 0.50mm Pitch, Square; 16 Pin, 3.00mm L X 3.00mm W X 0.80mm H Body (w/Thermal Tab 1.75 X 1.75mm),  IPC Medium Density"
  oval 0.8x0.3 smd: 1(-1.5,0.75) 2(-1.5,0.25) 3(-1.5,-0.25) 4(-1.5,-0.75) 9(1.5,-0.75) 10(1.5,-0.25) 11(1.5,0.25) 12(1.5,0.75)
  oval 0.3x0.8 smd: 5(-0.75,-1.5) 6(-0.25,-1.5) 7(0.25,-1.5) 8(0.75,-1.5) 13(0.75,1.5) 14(0.25,1.5) 15(-0.25,1.5) 16(-0.75,1.5)
  rect 1.75x1.75 smd: 17(0,0)
  silkscreen extent -2.62,-1.5 1.5,1.5, body extent -1.57,-1.57 1.58,1.58, height 0.8
QFN50P600X600X80-41N-S425 [mm] "QFN, 0.50mm Pitch, Square; 40 Pin, 6.00mm L X 6.00mm W X 0.80mm H body (w/Thermal Tab 4.25 x 4.25mm), IPC Medium Density"
  oval 0.9x0.3 smd: 1(-2.95,2.25) 2(-2.95,1.75) 3(-2.95,1.25) 4(-2.95,0.75) 5(-2.95,0.25) 6(-2.95,-0.25) 7(-2.95,-0.75) 8(-2.95,-1.25) 9(-2.95,-1.75) 10(-2.95,-2.25) 21(2.95,-2.25) 22(2.95,-1.75) 23(2.95,-1.25) 24(2.95,-0.75) 25(2.95,-0.25) 26(2.95,0.25) 27(2.95,0.75) 28(2.95,1.25) 29(2.95,1.75) 30(2.95,2.25)
  oval 0.3x0.9 smd: 11(-2.25,-2.95) 12(-1.75,-2.95) 13(-1.25,-2.95) 14(-0.75,-2.95) 15(-0.25,-2.95) 16(0.25,-2.95) 17(0.75,-2.95) 18(1.25,-2.95) 19(1.75,-2.95) 20(2.25,-2.95) 31(2.25,2.95) 32(1.75,2.95) 33(1.25,2.95) 34(0.75,2.95) 35(0.25,2.95) 36(-0.25,2.95) 37(-0.75,2.95) 38(-1.25,2.95) 39(-1.75,2.95) 40(-2.25,2.95)
  rect 4.25x4.25 smd: 41(0,0)
  silkscreen extent -4.13,-3 3,3, body extent -3,-3 3,3, height 0.8
QFN65P400X400X100-17N-S255 [mm] "QFN, 0.65mm pitch,square; 4 pin X 4 pin, 4mm X 4mm X 1mm H body (w/thermal tab 2.55 X 2.55mm),  IPC Medium Density"
  oval 0.9x0.4 smd: 1(-1.95,0.975) 2(-1.95,0.325) 3(-1.95,-0.325) 4(-1.95,-0.975) 9(1.95,-0.975) 10(1.95,-0.325) 11(1.95,0.325) 12(1.95,0.975)
  oval 0.4x0.9 smd: 5(-0.975,-1.95) 6(-0.325,-1.95) 7(0.325,-1.95) 8(0.975,-1.95) 13(0.975,1.95) 14(0.325,1.95) 15(-0.325,1.95) 16(-0.975,1.95)
  rect 2.55x2.55 smd: 17(0,0)
  silkscreen extent -3.13,-2 2,2, body extent -2,-2 2,2, height 1
QFN65P500X500X100-21N-S325 [mm] "QFN, 0.65mm pitch,square; 20 pin, 5mm X 5mm X 1mm H body (w/thermal tab 3.25 X 3.25mm),  IPC Medium Density"
  oval 1.05x0.35 smd: 1(-2.35,1.3) 2(-2.35,0.65) 3(-2.35,0) 4(-2.35,-0.65) 5(-2.35,-1.3) 11(2.35,-1.3) 12(2.35,-0.65) 13(2.35,0) 14(2.35,0.65) 15(2.35,1.3)
  oval 0.35x1.05 smd: 6(-1.3,-2.35) 7(-0.65,-2.35) 8(0,-2.35) 9(0.65,-2.35) 10(1.3,-2.35) 16(1.3,2.35) 17(0.65,2.35) 18(0,2.35) 19(-0.65,2.35) 20(-1.3,2.35)
  rect 3.25x3.25 smd: 21(0,0)
  silkscreen extent -3.57,-2.5 2.5,2.5, body extent -2.57,-2.57 2.58,2.58, height 1
RES_BOURNS_CFG0612 [mm] "EIA 0612, Metric 1632, Resistor, Chip; 1.60mm L X 3.20mm W X 0.90mm H, IPC Medium Density"
  rect 0.7x3.8 smd: 1(-0.775,0) 2(0.775,0)
  silkscreen extent 0,-1.6 0,1.6, body extent -0.8,-1.6 0.8,1.6, height 0.9
RESC1005X40N [mm] "Chip Resistor, EIA 0402, Metric 1005, Body 1.0x0.5mm, IPC Medium Density"
  rect 0.58x0.62 smd: 1(-0.47,0) 2(0.47,0)
  body extent -0.52,-0.27 0.53,0.28, height 0.4
RESC1608X55N [mm] "Chip Resistor, EIA 0603, Metric 1608, Body 1.6x0.8mm, IPC Medium Density"
  rect 0.9x1 smd: 1(-0.8,0) 2(0.8,0)
  body extent -0.87,-0.47 0.88,0.48, height 0.55
RESC2012X60N [mm] "Chip Resistor, EIA 0805, Metric 2012, Body 2.0x1.2mm, IPC Medium Density"
  rect 0.95x1.4 smd: 1(-1,0) 2(1,0)
  silkscreen extent 0,-0.55 0,0.55, body extent -1.1,-0.67 1.1,0.68, height 0.6
RESC2113X55N [mm] "Chip Resistor, EIA 0805, Metric 2113, Body 2.05x1.3mm, IPC Medium Density"
  rect 1x1.45 smd: 1(-0.95,0) 2(0.95,0)
  silkscreen extent 0,-0.55 0,0.55, body extent -1,-0.62 1,0.63, height 0.55
RESC3216X65N [mm] "Chip Resistor, EIA 1206, Metric 3216, Body 3.2x1.6mm, IPC Medium Density"
  rect 1.15x1.8 smd: 1(-1.45,0) 2(1.45,0)
  silkscreen extent -0.5,-0.9 0.5,0.9, body extent -1.67,-0.87 1.68,0.88, height 0.65
SAMTEC_HTSW-105-23-L-S [mm] "5 Contacts - Pitch 2.54mm - Single Row  Through Mount Straigh Header (Post Lead 5.84mm, Tail Lead 2.92mm, Insulator 2.54mm)"
  rect 1.7x1.7 hole 1: 1(0,0)
  round 1.7 hole 1: 2(2.54,0) 3(5.08,0) 4(7.62,0) 5(10.16,0)
  silkscreen extent -1.27,-1.27 11.43,1.93, body extent -1.27,-1.27 11.43,1.27, height 8.38
SOD2512X110N [mm]
  rect 0.9x0.5 smd: 1(-1.3,0) 2(1.3,0)
  silkscreen extent -1.62,-0.65 0.85,0.87, body extent -1.35,-0.67 1.35,0.68, height 1.1
SOD2513X114N [mm] "SOD-323 Diode; 1.75mm W X 1.30mm L X 1.14mm H Body, IPC Medium Density"
  rect 0.9x0.5 smd: 1(-1.3,0) 2(1.3,0)
  silkscreen extent -1.45,-0.72 0.95,0.82, body extent -1.4,-0.72 1.4,0.73, height 1.15
SODFL3517X110N [mm] "SODFL Diode (SOD123W); 2.60mm W X 1.70mm L X 1.10mm H body, IPC Medium Density"
  rect 0.92x1.08 smd: 1(-1.6,0) 2(1.6,0)
  silkscreen extent -1.93,-0.85 0.75,1.17, body extent -1.85,-0.95 1.85,0.95, height 1.1
SOIC127P600X170-9N-R240X310 [mm] "SOIC, 1.27mm Pitch, 8 Pin, 3.90mm W X 4.90mm L X 1.70mm H body (w/Thermal Tab 2.40 X 3.10mm), IPC Medium Density"
  rect 1.55x0.6 smd: 1(-2.7,1.905) 2(-2.7,0.635) 3(-2.7,-0.635) 4(-2.7,-1.905) 5(2.7,-1.905) 6(2.7,-0.635) 7(2.7,0.635) 8(2.7,1.905)
  rect 2.4x3.1 smd: 9(0,0)
  silkscreen extent -3.32,-2.45 1.55,2.88, body extent -3.1,-2.5 3.1,2.5, height 1.75
SOIC127P600X175-8N [mm]
  rect 1.55x0.6 smd: 1(-2.7,1.905) 2(-2.7,0.635) 3(-2.7,-0.635) 4(-2.7,-1.905) 5(2.7,-1.905) 6(2.7,-0.635) 7(2.7,0.635) 8(2.7,1.905)
  silkscreen extent -2.52,-2.5 1.55,2.88, body extent -3.1,-2.5 3.1,2.5, height 1.75
SOIC127P600X175-9N-R241X309 [mm] "SOIC 8, Pitch 1.27mm - Body 3.9x4.9mm, (w/thermal tab 2.41mm X 3.098mm), IPC Medium Density"
  rect 1.55x0.6 smd: 1(-2.65,1.905) 2(-2.65,0.635) 3(-2.65,-0.635) 4(-2.65,-1.905) 5(2.65,-1.905) 6(2.65,-0.635) 7(2.65,0.635) 8(2.65,1.905)
  rect 2.41x3.098 smd: 9(0,0)
  silkscreen extent -3.27,-2.45 1.5,2.87, body extent -3.1,-2.5 3.1,2.5, height 1.75
SOIC127P610X167-9N-R245X335 [mm] "SOIC, 1.27mm pitch; 8 pin, 3.89mm W X 4.90mm L X 1.67mm H body (w/thermal tab 2.45mm X 3.35mm), IPC Medium Density"
  rect 1.65x0.6 smd: 1(-2.7,1.905) 2(-2.7,0.635) 3(-2.7,-0.635) 4(-2.7,-1.905) 5(2.7,-1.905) 6(2.7,-0.635) 7(2.7,0.635) 8(2.7,1.905)
  rect 2.45x3.35 smd: 9(0,0)
  silkscreen extent -3.38,-2.45 1.5,2.87, body extent -3.05,-2.45 3.05,2.45, height 1.67
SOIC-OA8_M [mm] "SOIC, 8-Leads, Body 4.9x3.9mm, Pitch 1.27mm, IPC Low Density"
  oval 2.5x0.7 smd: 1(-2.45,1.905) 2(-2.45,0.635) 3(-2.45,-0.635) 4(-2.45,-1.905) 5(2.45,-1.905) 6(2.45,-0.635) 7(2.45,0.635) 8(2.45,1.905)
  silkscreen extent -2.57,-2.5 0.8,2.93, body extent -2,-2.5 2,2.5, height 1.75
SON50P300X300X80-9N-R175X248 [mm] "SON, (DFN) 0.50mm,pitch; 8 pin,3.00mm W X 3.00mm L X 0.80mm H body (w/thermal tab 1.75 X2.48mm), IPC Medium Density"
  rect 0.8x0.3 smd: 1(-1.5,0.75) 2(-1.5,0.25) 3(-1.5,-0.25) 4(-1.5,-0.75) 5(1.5,-0.75) 6(1.5,-0.25) 7(1.5,0.25) 8(1.5,0.75)
  rect 1.75x2.45 smd: 9(0,0)
  silkscreen extent -2.53,-1.5 1.5,1.5, body extent -1.55,-1.55 1.55,1.55, height 0.8
SON50P300X300X80-13N-R180X260 [mm] "SON, 0.50mm Pitch, 12-Pin, 3.00mm W  X 3.00mm L X 0.80mm Height, (w/Thermal Tab 1.8 X 2.6 mm), IPC Medium Density"
  rect 0.8x0.3 smd: 1(-1.5,1.25) 2(-1.5,0.75) 3(-1.5,0.25) 4(-1.5,-0.25) 5(-1.5,-0.75) 6(-1.5,-1.25) 7(1.5,-1.25) 8(1.5,-0.75) 9(1.5,-0.25) 10(1.5,0.25) 11(1.5,0.75) 12(1.5,1.25)
  rect 1.8x2.6 smd: 13(0,0)
  silkscreen extent -2.52,1.13 -2.28,1.38, body extent -1.55,-1.55 1.55,1.55, height 0.8
SOP65P490X109-8N [mm] "SOP, 0.65mm pitch; 8 pin,3.00mm W X 3.00mm L X 1.09mm H bodyI, PC Medium Density"
  rect 1.5x0.45 smd: 1(-2.2,0.975) 2(-2.2,0.325) 3(-2.2,-0.325) 4(-2.2,-0.975) 5(2.2,-0.975) 6(2.2,-0.325) 7(2.2,0.325) 8(2.2,0.975)
  silkscreen extent -2.82,-1.5 1.12,1.82, body extent -2.45,-1.55 2.45,1.55, height 1.09
SOP65P640X110-14N [mm]
  rect 1.45x0.45 smd: 1(-2.9,1.95) 2(-2.9,1.3) 3(-2.9,0.65) 4(-2.9,0) 5(-2.9,-0.65) 6(-2.9,-1.3) 7(-2.9,-1.95) 8(2.9,-1.95) 9(2.9,-1.3) 10(2.9,-0.65) 11(2.9,0) 12(2.9,0.65) 13(2.9,1.3) 14(2.9,1.95)
  silkscreen extent -3.47,-2.5 1.85,2.82, body extent -3.12,-2.55 3.12,2.55, height 1.1
SOP65P640X120-16N [mm]
  rect 1.45x0.45 smd: 1(-2.95,2.275) 2(-2.95,1.625) 3(-2.95,0.975) 4(-2.95,0.325) 5(-2.95,-0.325) 6(-2.95,-0.975) 7(-2.95,-1.625) 8(-2.95,-2.275) 9(2.95,-2.275) 10(2.95,-1.625) 11(2.95,-0.975) 12(2.95,-0.325) 13(2.95,0.325) 14(2.95,0.975) 15(2.95,1.625) 16(2.95,2.275)
  silkscreen extent -3.08,-2.55 1.85,3.17, body extent -3.12,-2.55 3.12,2.55, height 1.2
SOT65P210X110-6N [mm]
  rect 0.95x0.4 smd: 1(-1.1,0.65) 2(-1.1,0) 3(-1.1,-0.65) 4(1.1,-0.65) 5(1.1,0) 6(1.1,0.65)
  silkscreen extent -1.43,-1 0.3,1.47, body extent -1.2,-1.1 1.2,1.1, height 1.1
SOT95P230X110-3N [mm] "SOT23, 3 pin, Pitch 0.95mm - 1.3mm W X 2.9mm L X 1.1mm H, IPC Medium Density"
  rect 1x0.6 smd: 1(-1.15,0.95) 2(-1.15,-0.95) 3(1.15,0)
  silkscreen extent -1.53,-1.45 0.33,1.87, body extent -1.08,-1.5 1.25,1.5, height 1.1
SOT95P240X110-3N [mm]
  rect 1.05x0.65 smd: 1(-1.15,0.95) 2(-1.15,-0.95) 3(1.15,0)
  silkscreen extent -2.29,-1.45 0.3,1.45, body extent -1.25,-1.5 1.25,1.5, height 1.1
SOT95P270X145-5N [mm] "SOT, 0.95mm Pitch; 5 Pin,1.55mm W X 2.90mm L X 1.45mm H body, IPC Medium Density"
  rect 1.25x0.6 smd: 1(-1.35,0.95) 2(-1.35,0) 3(-1.35,-0.95) 4(1.35,-0.95) 5(1.35,0.95)
  silkscreen extent -1.83,-1.45 0.4,1.87, body extent -1.35,-1.45 1.35,1.45, height 1.45
SOT95P280X100-5N [mm] "SOT23, 0.95mm pitch; 5 pin, 1.625mm W X 2.9mm L, IPC Medium Density"
  rect 1.1x0.55 smd: 1(-1.35,0.95) 2(-1.35,0) 3(-1.35,-0.95) 4(1.35,-0.95) 5(1.35,0.95)
  silkscreen extent -1.77,-1.45 0.48,1.87, body extent -1.4,-1.5 1.4,1.5, height 1
SOT95P280X145-5N [mm] "SOT, 0.95mm pitch; 5 pin, 1.60mm W X 2.90mm L X 1.45mm H body, IPC Medium Density"
  rect 1.1x0.6 smd: 1(-1.3,0.95) 2(-1.3,0) 3(-1.3,-0.95) 4(1.3,-0.95) 5(1.3,0.95)
  silkscreen extent -1.72,-1.45 0.43,1.87, body extent -1.4,-1.5 1.4,1.5, height 1.45
SOT190P230X110-4N [mm] "SOT143, SOT, 1.90mm Pitch; 4 Pin, 1.30mm W X 2.90mm L X 1.10mm H body, IPC Medium Density"
  rect 1x1 smd: 1(-1.15,0.75)
  rect 1x0.6 smd: 2(-1.15,-0.95) 3(1.15,-0.95) 4(1.15,0.95)
  silkscreen extent -1.52,-1.45 0.33,1.88, body extent -1.25,-1.5 1.25,1.5, height 1.1
SOT-23 [mil]
  rect 36x36 smd: 1(0,0) 2(75,0)
  rect 36x50 smd: 3(38,80)
  silkscreen extent -20,-5 95,85, body extent -21,-5 97,93, height 47
STM-LQFP48_M [mm] "QFP, 48-Leads, Body 7x7mm, Pitch 0.5mm, IPC Low Density"
  oval 1.65x0.3 smd: 1(-4.325,2.75) 2(-4.325,2.25) 3(-4.325,1.75) 4(-4.325,1.25) 5(-4.325,0.75) 6(-4.325,0.25) 7(-4.325,-0.25) 8(-4.325,-0.75) 9(-4.325,-1.25) 10(-4.325,-1.75) 11(-4.325,-2.25) 12(-4.325,-2.75) 25(4.325,-2.75) 26(4.325,-2.25) 27(4.325,-1.75) 28(4.325,-1.25) 29(4.325,-0.75) 30(4.325,-0.25) 31(4.325,0.25) 32(4.325,0.75) 33(4.325,1.25) 34(4.325,1.75) 35(4.325,2.25) 36(4.325,2.75)
  oval 0.3x1.65 smd: 13(-2.75,-4.325) 14(-2.25,-4.325) 15(-1.75,-4.325) 16(-1.25,-4.325) 17(-0.75,-4.325) 18(-0.25,-4.325) 19(0.25,-4.325) 20(0.75,-4.325) 21(1.25,-4.325) 22(1.75,-4.325) 23(2.25,-4.325) 24(2.75,-4.325) 37(2.75,4.325) 38(2.25,4.325) 39(1.75,4.325) 40(1.25,4.325) 41(0.75,4.325) 42(0.25,4.325) 43(-0.25,4.325) 44(-0.75,4.325) 45(-1.25,4.325) 46(-1.75,4.325) 47(-2.25,4.325) 48(-2.75,4.325)
  silkscreen extent -4.45,-3.1 3.1,3.57, body extent -3.5,-3.5 3.5,3.5, height 1.6
TEXAS_RGX0011A [mm] "TEXAS Case Style (R-VQFN-HR-N11), 0.50mm Pitch, 11-pin, 2.00mm W X 3.00mm L X 1.00mm H Body"
  oval 2.75x0.3 smd: 1(0,0.5) 2(0,0) 3(0,-0.5)
  oval 0.3x0.85 smd: 4(-0.75,-1.45) 5(-0.25,-1.45) 6(0.25,-1.45) 7(0.75,-1.45) 8(0.75,1.45) 9(0.25,1.45) 10(-0.25,1.45) 11(-0.75,1.45)
  silkscreen extent -2.07,0.38 -1.83,0.62, body extent -1,-1.5 1,1.5, height 1
THERMC1608X95N [mm] "PTC Thermistors, Chip; 1.6mm L X 0.8mm W X 0.95mm H, IPC Medium Density"
  rect 0.8x1 smd: 1(-0.85,0) 2(0.85,0)
  body extent -0.87,-0.47 0.88,0.48, height 0.95
TO127P991X239-6N-R585X701 [mm] "TO-252 DPAK TO, 1.27mm Pitch; 5 Pin, 10.3mm L X 8.781mm W X 2.39mm H body"
  rect 2x0.76 smd: 1(-4.35,2.54) 2(-4.35,1.27) 3(-4.35,0) 4(-4.35,-1.27) 5(-4.35,-2.54)
  rect 5.85x7.1 smd: 6(2.425,0)
  silkscreen extent -5.12,-3.25 -0.85,3.65, body extent -4.9,-3.25 4.9,3.25, height 2.24
TO228P972X240-3N-R540X510 [mm] "TO-252 DPAK TO, 2.28mm Pitch; 2 Pin, 9.725mm L X 6.50mm W X 2.40mm H body, IPC Medium Density"
  rect 2.1x1 smd: 1(-4.35,2.28) 2(-4.35,-2.28)
  rect 5.85x5.5 smd: 3(2.45,0)
  silkscreen extent -5.27,-3.25 -0.85,3.43, body extent -4.9,-3.3 4.82,3.3, height 2.4
TPS127 [mm] "1.27 x  1.27mm SMD Test Point Area"
  rect 1.27x1.27 smd paste-1.27: 1(0,0)
  silkscreen extent -0.94,-0.94 0.94,0.94
XTAL_TXC_7A [mm] "2 Pins, 3.2x5mm, SMD Glass Seam Sealing Crystal, 7A Serie"
  rect 1.7x2.4 smd: 1(-1.85,0) 2(1.85,0)
  silkscreen extent -2.3,-1.6 2.3,1.6, body extent -2.5,-1.6 2.5,1.6, height 1.2

## Part data
B5A B5B B6A B6B B7A B7B B8A B8B B9A B9B B10A B10B B11A B11B B12A B12B B13A B13B B14A B14B B15A B15B B16A B16B B17A B17B: library part PLATED_HOLE2.4_PAD4.0, "Single Terminal Socket", Author="CERN DEM JMW", Component Type="Standard (No BOM)", ComponentHeight=0mm, CreateDate=10.10.2011, Family="Plated Hole", HelpURL=Undefined, LatestRevisionDate=10.10.2011, Mounted=No, PackageDescription="Plated Through Hole: Hole Dia.=2.4mm Pad Dia.=4.0mm", Part Description="Plated Through Hole: Hole Dia.=2.4mm Pad Dia.=4.0mm", Part Number=PLATED_HOLE2.4_PAD4.0, Pin Count=1, Sense=No, SMD=No, Socket=No, Status=None
C1A C1B C24 C71 C84 C88 C93 C96 C106 C107: library part CC0402_10NF_16V_10%_X7R, "Non-polarised capacitor", Case=0402, Manufacturer=GENERIC, Manufacturer1 ComponentHeight=0.55mm, Manufacturer1 Example=PHYCOMP, Manufacturer1 Part Number=223878715636, Tolerance=±10%, Voltage=16V, Author="CERN DEM JLC", Component Type=Standard, HelpURL=\\cern.ch\dfs\Applications\Altium\Datasheets\CC0402_X7R_PHYCOMP.pdf, Manufacturer Part Number=CC0402_10NF_16V_10%_X7R, Mounted=Yes, Part Description="SMD Multilayer Chip Ceramic Capacitor", Part Number=CC0402_10NF_16V_10%_X7R, Pin Count=2, Sense=No, SMD=Yes, Socket=No, Status="Not Recommended", TC=X7R
  C1A C1B C93: CreateDate=2007-12-03, LatestRevisionDate=2007-12-03
  C24 C84: CreateDate=03-Dec-07, LatestRevisionDate=03-Dec-07
  C71 C88 C96 C106 C107: CreateDate=03.12.2007, LatestRevisionDate=03.12.2007
C2A C2B: library part CC0603_NO-VALUE, "Non-polarised capacitor", Case=0603, Manufacturer1 ComponentHeight=0.9mm, Author="CERN DEM MR", Component Type=Standard, CreateDate=22.11.2016, HelpURL=Undefined, LatestRevisionDate=22.11.2016, Manufacturer=Undefined, Manufacturer Part Number=CC0603_NO-VALUE, Mounted=No, Part Description="Reserved Footprint For 0603(1608) Chip Ceramic Capacitor", Part Number=CC0603_NO-VALUE, Pin Count=2, Sense=No, SMD=Yes, Socket=No, Status=None
C3A C3B C44A C44B C52A C52B: library part CC0603_2.2NF_50V_5%_C0G, "Non-polarised capacitor", Case=0603, Manufacturer=GENERIC, Manufacturer1 ComponentHeight=0.9mm, Manufacturer1 Example=TDK, Manufacturer1 Part Number=C1608C0G1H222J080AA, Tolerance=±5%, Voltage=50V, Author="CERN DEM JMW", Component Type=Standard, CreateDate=23.06.2014, HelpURL=\\cern.ch\dfs\Applications\Altium\Datasheets\CC0603_C0G_TDK_C.pdf, LatestRevisionDate=23.06.2014, Manufacturer Part Number=CC0603_2.2NF_50V_5%_C0G, Mounted=Yes, Part Description="SMD Multilayer Chip Ceramic Capacitor", Part Number=CC0603_2.2NF_50V_5%_C0G, Pin Count=2, Sense=No, SMD=Yes, Socket=No, Status=Preferred, TC=C0G/NP0